# Altium PCB Fly_2_0425p1.PcbDoc (part 1 of 2)
Units mil, origin at the board's own origin, x right, y up, seen from the top; angles counter-clockwise.
Board outline 6426 x 1969.5 mil, 4 copper layers (TOP, GND02, PWR03, BOTTOM), stack 28.8 mil thick; 153 components, 128 nets, 741 pads, 411 vias.
Unrouted connection lines stored in the file: 3.
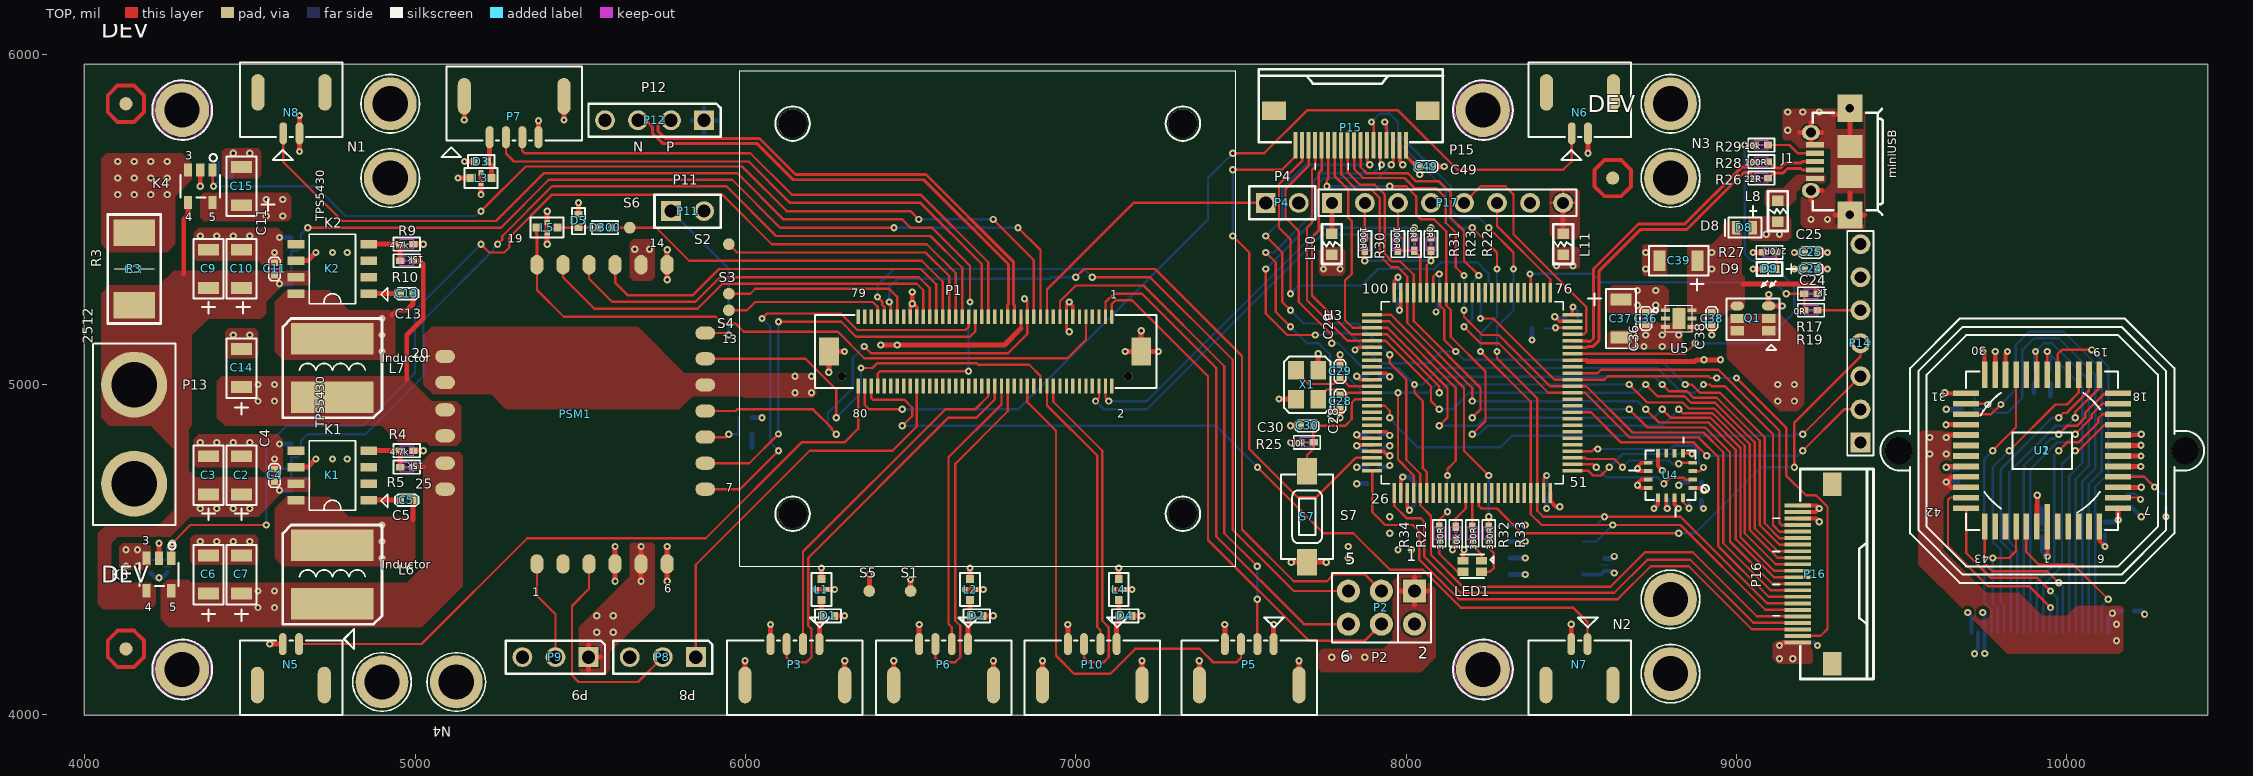
[diagram p0: TOP view]
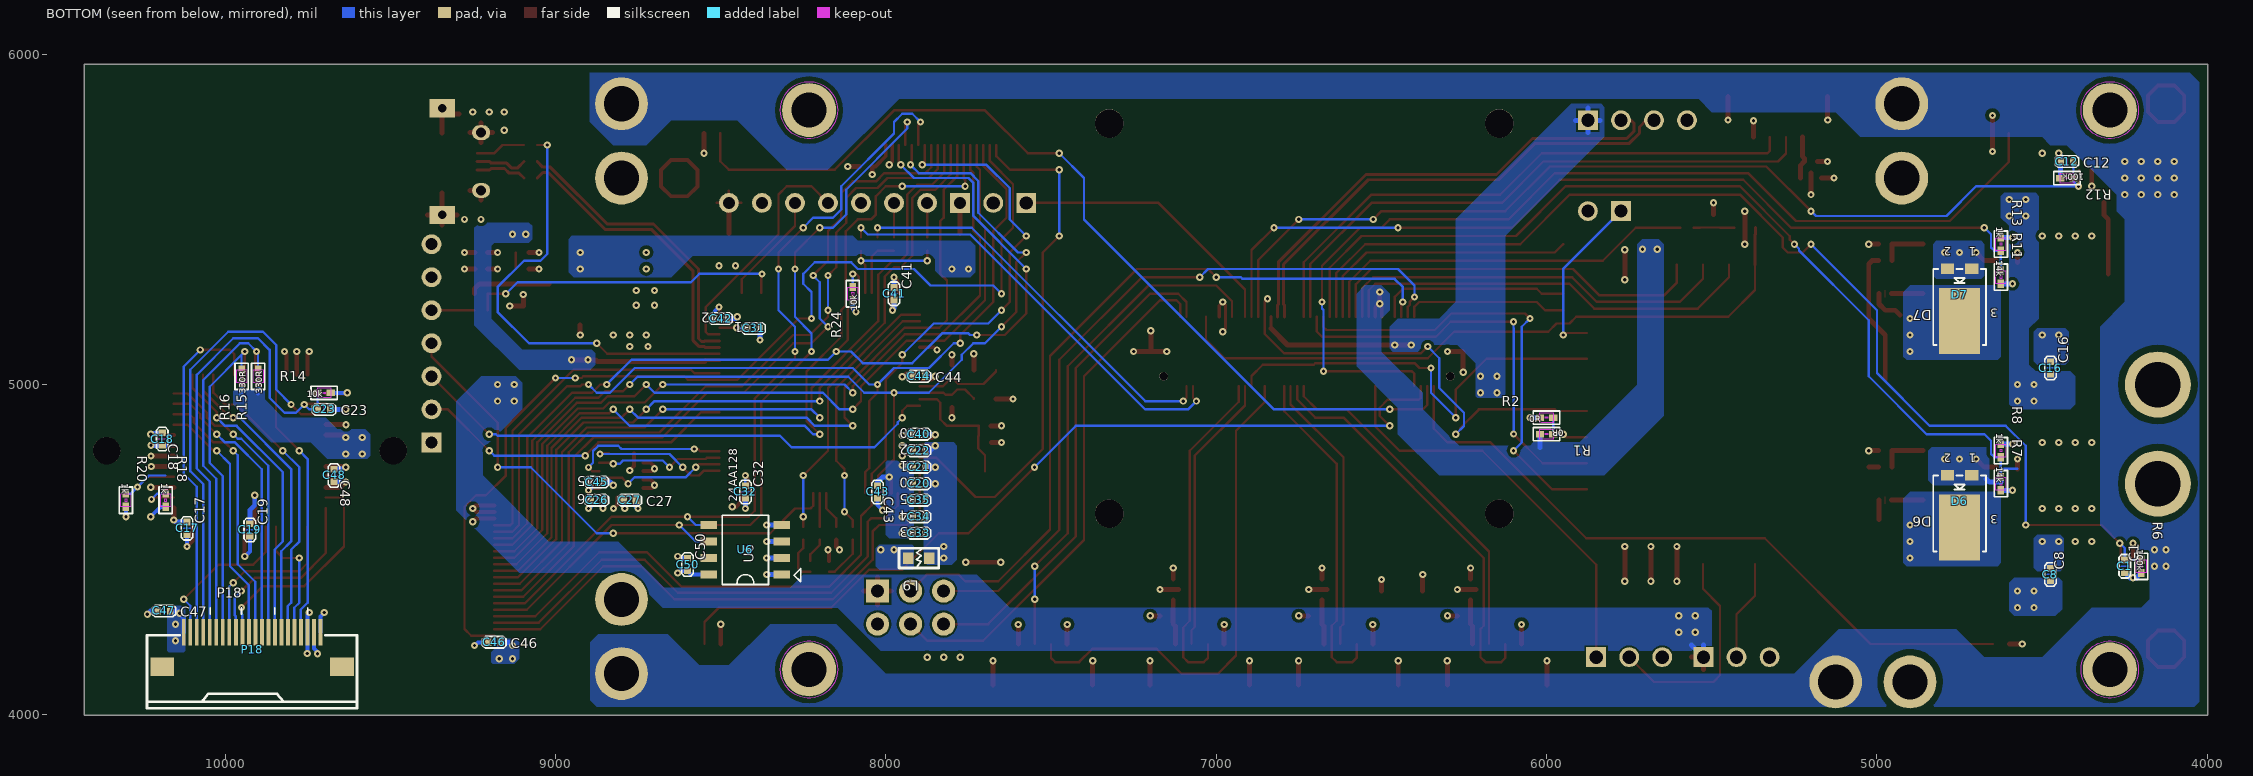
[diagram p1: BOTTOM view, seen from below]
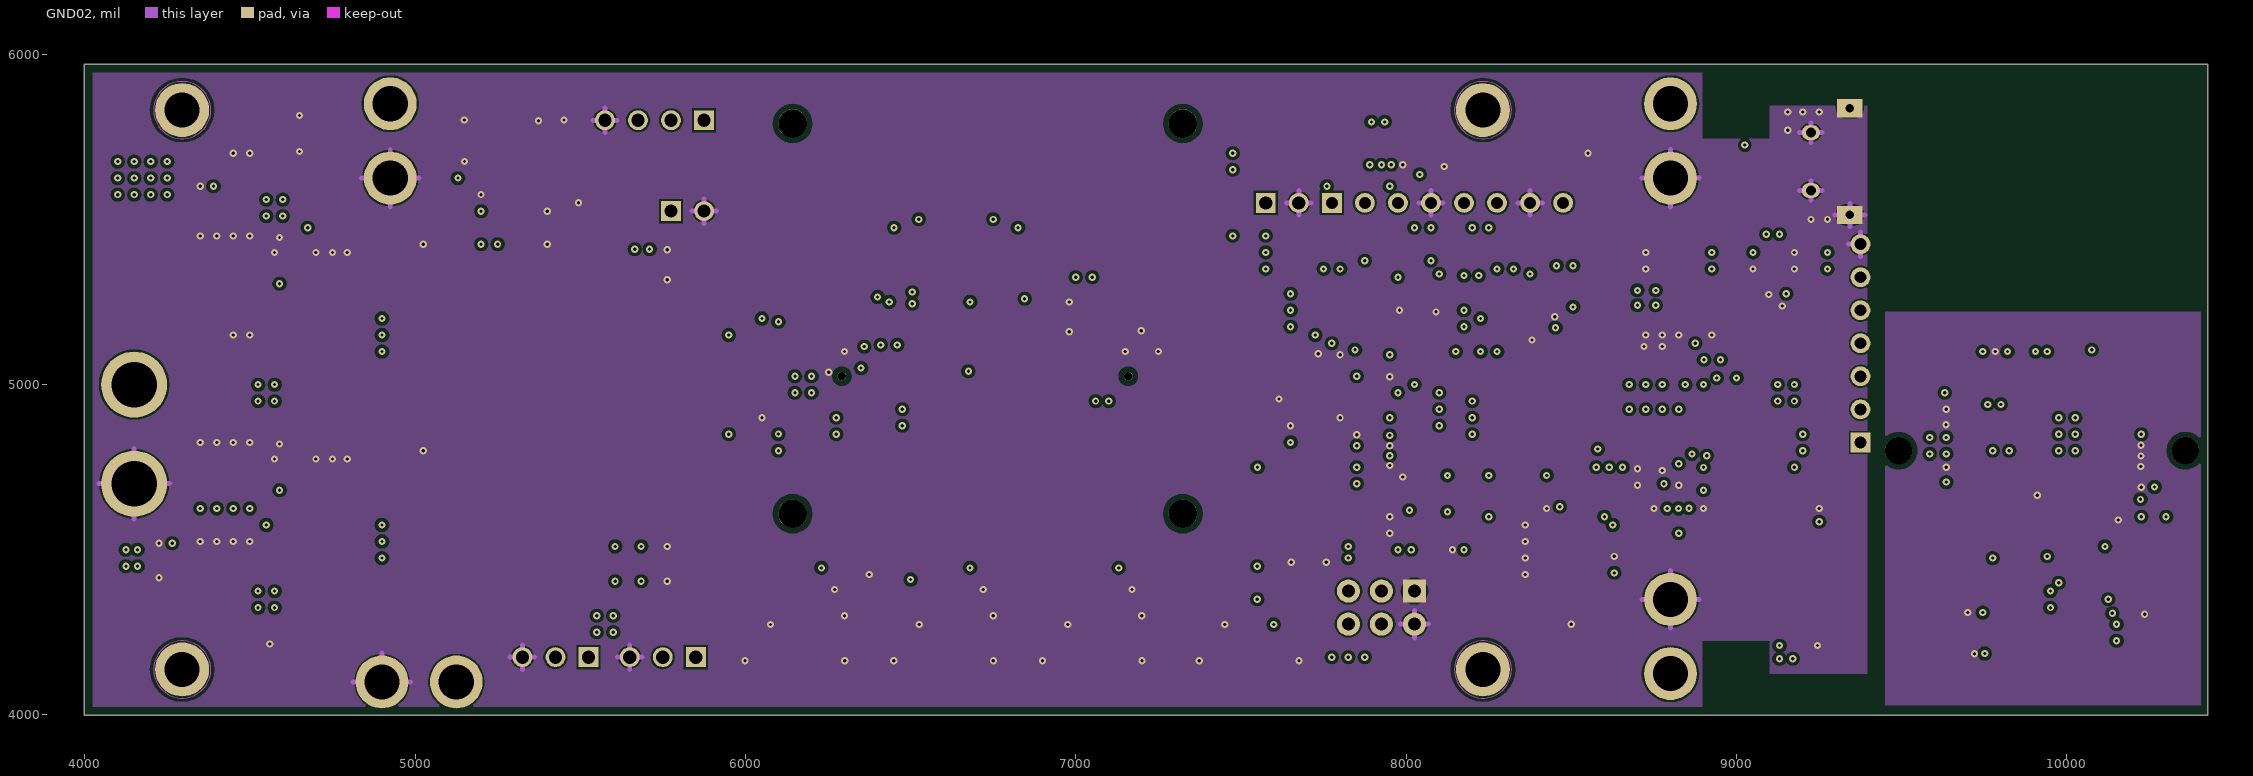
[diagram p2: GND02]
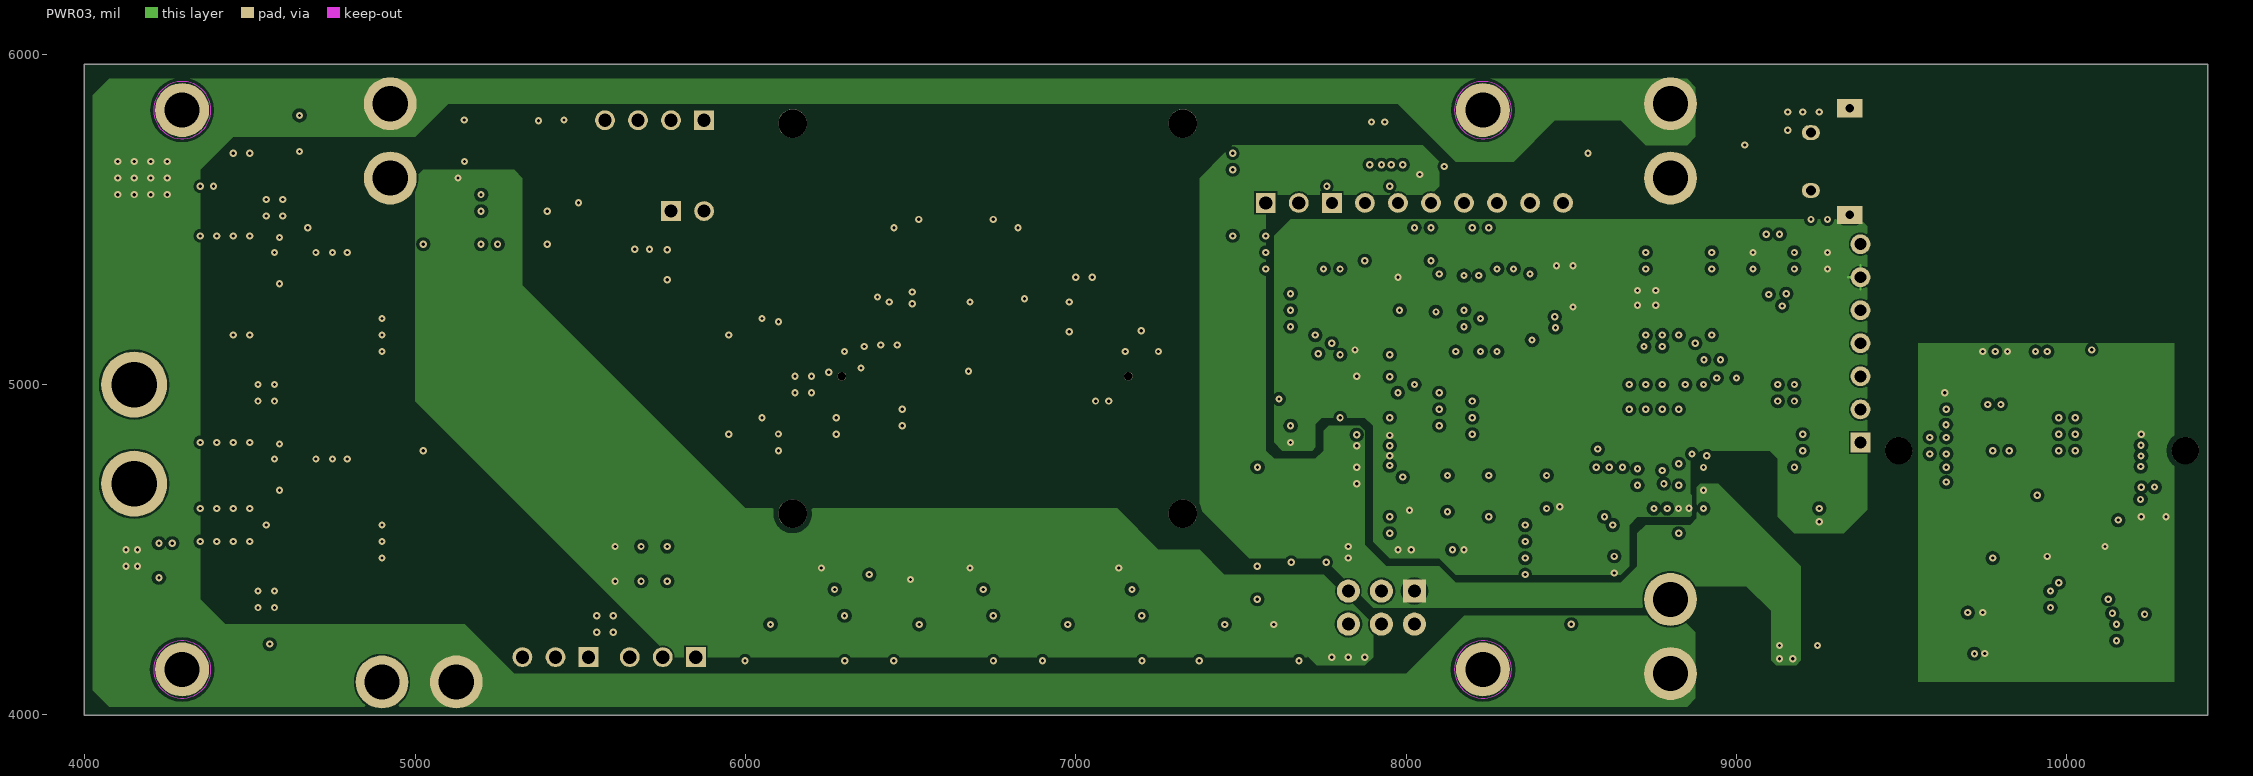
[diagram p3: PWR03]

## Layer stack, top to bottom
TOP: signal copper 1.2
Dielectric: core 8, FR-4, Dk 4.5
GND02: signal copper 1.2
Dielectric: core 8, FR-4, Dk 4.5
PWR03: signal copper 1.2
Dielectric: core 8, FR-4, Dk 4.5
BOTTOM: signal copper 1.2

## Board outline
3999.5,3999.5 10425.5,3999.5 10425.5,5969 3999.5,5969

## Design rules (kind name [scope] priority, off if disabled: settings)
Clearance [All] p1: gap=10
PlaneConnect [All] p1: planeconnectstyle=Direct reliefexpansion=20 reliefentries=4 reliefconductorwidth=10 reliefairgap=10
PolygonConnect [All] p1: connectstyle=Direct reliefconductorwidth=10 reliefentries=4 polygonreliefangle="90 Angle" airgapwidth=10
RoomDefinition CompsKeepin0 [All vs False] p1: confinementstyle=ConfineIn formatcopy=TRUE lockcomponents=FALSE outline 8871.25,4050 4050,4050 4050,5918.5 8871.25,5918.5 8871.25,5718.5 9125,5718.5 9125,5818.5 9371.25,5818.5 9371.25,4150 9125,4150 9125,4250 8871.25,4250 8871.25,4050
RoutingVias [All] p1: holewidth=28 width=50 viastyle="Through Hole" minholewidth=28 minwidth=50 maxholewidth=28 maxwidth=50
SolderMaskExpansion [All] p1: expansion=4
Width [All] p1: maxlimit=10 minlimit=10 preferedwidth=10 impedancedriven=TRUE minimp=66.780000 maximp=66.780000 favimp=66.780000
27 further rules are at their usual default settings.

## Components (designator, comment, footprint, x,y, rotation, side; value= is the part's Value field where it differs from the comment)
C1 "C0402" C0402#1 4250,4450 r270 bottom
C2 "C1206" C1206 4475,4725.45 r90 top
C3 "C1206" C1206 4375,4725.45 r90 top
C4 "C0402" C0402#2 4575,4725 r90 top
C5 "C0402" C0402#3 4975,4650 r0 top
C6 "C1206" C1206 4375,4425.45 r90 top
C7 "C1206" C1206 4475,4425.45 r90 top
C8 "C0402" C0402#1 4475,4425 r270 bottom
C9 "C1206" C1206 4375,5350.45 r90 top
C10 "C1206" C1206 4475,5350.45 r90 top
C11 "C0402" C0402#2 4575,5350 r90 top
C12 "C0402" C0402#4 4425,5675 r0 bottom
C13 "C0402" C0402#3 4975,5275 r0 top
C14 "C1206" C1206 4475,5050.45 r90 top
C15 "C1206" C1206 4475,5600.45 r90 top
C16 "C0402" C0402#1 4475,5050 r270 bottom
C17 "C0402" C0402#1 10115,4565 r270 bottom
C18 "C0402" C0402#4 10190,4835 r90 bottom
C19 "C0402" C0402#1 9925,4560 r270 bottom
C20 "C0402" C0402#4 7900,4700 r180 bottom
C21 "C0402" C0402#4 7900,4750 r180 bottom
C22 "C0402" C0402#4 7900,4800 r180 bottom
C23 "C0402" C0402#4 9700,4925 r0 bottom
C24 "C0402" C0402#2 9225,5350 r180 top
C25 "C0402" C0402#2 9225,5400 r180 top
C26 "C0402" C0402#4 8875,4650 r180 bottom
C27 "C0402" C0402#4 8775,4650 r0 bottom
C28 "C0402" C0402#2 7800,4950 r270 top
C29 "C0402" C0402#2 7800,5040 r270 top
C30 "C0402" C0402#2 7700,4875 r180 top
C31 "C0402" C0402#4 8400,5170 r180 bottom
C32 "C0402" C0402#1 8425,4675 r270 bottom
C33 "C0402" C0402#4 7900,4550 r180 bottom
C34 "C0402" C0402#4 7900,4600 r180 bottom
C35 "C0402" C0402#4 7900,4650 r180 bottom
C36 "C0402" C0402#2 8725,5200 r270 top
C37 "C1206" C1206 8650,5199.55 r270 top
C38 "C0402" C0402#2 8925,5200 r270 top
C39 "C1206" C1206 8824.55,5375 r180 top
C40 "C0402" C0402#4 7900,4850 r180 bottom
C41 "C0402" C0402#1 7975,5275 r270 bottom
C42 "C0402" C0402#4 8500,5200 r180 bottom
C43 "C0402" C0402#4 8025,4675 r90 bottom
C44 "C0402" C0402#4 7900,5025 r0 bottom
C45 "C0402" C0402#4 8875,4705 r180 bottom
C46 "C0402" C0402#4 9185,4220 r0 bottom
C47 "C0402" C0402#4 10185,4315 r0 bottom
C48 "C0402" C0402#4 9670,4725 r90 bottom
C49 "C0402" C0402#2 8060,5660 r180 top
C50 "C0402" C0402#1 8600,4455 r270 bottom
D1 "0402-TVS" 0402-TVS 6250,4300 r0 top
D2 "0402-TVS" 0402-TVS 6700,4300 r0 top
D3 "0402-TVS" 0402-TVS 5200,5675 r180 top
D4 "0402-TVS" 0402-TVS 7150,4300 r0 top
D5 "0402-TVS" 0402-TVS 5495,5495 r90 top
D6 "TO-277A" TO-277A 4750,4612.5 r180 bottom
D7 "TO-277A" TO-277A 4750,5237.5 r180 bottom
D8 "D0603" D0603 9025,5475 r180 top
D9 "LED0402" LED0402 9100,5350 r180 top
D300 "0402-TVS" 0402-TVS 5575,5475 r0 top
J1 "USBMICRO5_6A" USBMICRO5_6A 9320.08,5674.8 r90 top
K1 "HSOIC-8" HSOIC-8#1 4750,4725 r90 top
K2 "HSOIC-8" HSOIC-8#1 4750,5350 r90 top
K3 "SOT-23-5" SOT-23-5 4225,4425 r180 top
K4 "SOT-23-5" SOT-23-5 4350,5600 r180 top
L1 "KYOCERA-KNH16-DA" KYOCERA-KNH16-DA 6230,4380 r270 top
L2 "KYOCERA-KNH16-DA" KYOCERA-KNH16-DA 6680,4380 r270 top
L3 "KYOCERA-KNH16-DA" KYOCERA-KNH16-DA 5200,5625 r0 top
L4 "KYOCERA-KNH16-DA" KYOCERA-KNH16-DA 7130,4380 r270 top
L5 "KYOCERA-KNH16-DA" KYOCERA-KNH16-DA 5400,5475 r180 top
L6 "CKCD5D28" CKCD5D28 4750,4425 r0 top
L7 "CKCD5D28" CKCD5D28 4750,5050 r0 top
L8 "L0603" L0603#1 9125,5525 r90 top
L9 "L0603" L0603#2 7900,4475 r180 bottom
L10 "L0603" L0603#1 7775,5425 r270 top
L11 "L0603" L0603#1 8475,5425 r270 top
LED1 "LTST-C19HE1WT" LTST-C19HE1WT 8200,4450 r270 top
N1 "ESC_POWER" ESC_POWER 4925,5737.5 r270 top
N2 "ESC_POWER" ESC_POWER 8800,4237.5 r90 top
N3 "ESC_POWER" ESC_POWER 8800,5737.5 r270 top
N4 "ESC_POWER" ESC_POWER 5012.5,4100 r180 top
N5 "EXC_CONTROL" EXC_CONTROL 4625.55,4113.28 r180 top
N6 "EXC_CONTROL" EXC_CONTROL 8524.45,5861.72 r0 top
N7 "EXC_CONTROL" EXC_CONTROL 8525.55,4113.28 r180 top
N8 "EXC_CONTROL" EXC_CONTROL 4624.45,5861.72 r0 top
P1 "CON-DF17-80M" CON-DF17-80M 6725.28,5100.34 r0 top
P2 "HDR2X3" HDR2X3 7927.25,4322.5 r180 top
P3 "CLICKMATE_V4" CLICKMATE_V4 6149.8,4113.28 r180 top
P4 "HDR1X2" HDR1X2 7625,5550 r0 top
P5 "CLICKMATE_V4" CLICKMATE_V4 7524.8,4113.28 r180 top
P6 "CLICKMATE_V4" CLICKMATE_V4 6599.8,4113.28 r180 top
P7 "CLICKMATE_V4" CLICKMATE_V4 5300,5850 r0 top
P8 "HDR1X3" HDR1X3 5750,4175 r180 top
P9 "HDR1X3" HDR1X3 5425,4175 r180 top
P10 "CLICKMATE_V4" CLICKMATE_V4 7049.8,4113.28 r180 top
P11 "HDR1X2" HDR1X2 5825,5525 r0 top
P12 "HDR1X4" HDR1X4 5725,5800 r180 top
P13 "VBAT_JACK" VBAT_JACK 4150,4850 r270 top
P14 "HDR1X7" HDR1X7 9375,5125 r90 top
P15 "FPC-18_0P5" FPC-18_0P5 7832.5,5845 r180 top
P16 "FPC-22_0P5" FPC-22_0P5#1 9305,4427.5 r90 top
P17 "HDR1X8" HDR1X8 8125,5550 r0 top
P18 "FPC-22_0P5" FPC-22_0P5#2 9917.5,4130 r0 bottom
PSM1 "PSM" PSM 5484.84,4909.85 r90 top
Q1 "TSOP-6" TSOP-6 9050,5196.5 r90 top
R1 "R0402" R0402#1 6000,4850 r180 bottom
R2 "R0402" R0402#1 6000,4900 r0 bottom
R3 "2512" 2512 4150,5350 r90 top
R4 "R0402" R0402#2 4975,4800 r0 top
R5 "R0402" R0402#2 4975,4750 r180 top
R6 "R0402" R0402#1 4200,4450 r90 bottom
R7 "R0402" R0402#1 4625,4700 r90 bottom
R8 "R0402" R0402#1 4625,4800 r90 bottom
R9 "R0402" R0402#2 4975,5425 r0 top
R10 "R0402" R0402#2 4975,5375 r180 top
R11 "R0402" R0402#1 4625,5325 r90 bottom
R12 "R0402" R0402#1 4425,5625 r180 bottom
R13 "R0402" R0402#1 4625,5425 r90 bottom
R14 "R0402" R0402#1 9700,4975 r0 bottom
R15 "R0402" R0402#1 9900,5025 r270 bottom
R16 "R0402" R0402#1 9950,5025 r270 bottom
R17 "R0402" R0402#2 9225,5275 r180 top
R18 "R0402" R0402#1 10180,4650 r90 bottom
R19 "R0402" R0402#2 9225,5225 r0 top
R20 "R0402" R0402#1 10300,4650 r90 bottom
R21 "R0402" R0402#2 8150,4550 r90 top
R22 "R0402" R0402#2 8075,5425 r270 top
R23 "R0402" R0402#2 8025,5425 r270 top
R24 "R0402" R0402#1 8100,5275 r270 bottom
R25 "R0402" R0402#2 7700,4825 r0 top
R26 "R0402" R0402#2 9075,5625 r0 top
R27 "R0402" R0402#2 9100,5400 r180 top
R28 "R0402" R0402#2 9075,5675 r0 top
R29 "R0402" R0402#2 9075,5725 r0 top
R30 "R0402" R0402#2 7875,5425 r270 top
R31 "R0402" R0402#2 7975,5425 r270 top
R32 "R0402" R0402#2 8200,4550 r90 top
R33 "R0402" R0402#2 8250,4550 r90 top
R34 "R0402" R0402#2 8100,4550 r90 top
S1 "PAD_04X04" PAD_04X04 6500,4375 r0 top
S2 "PAD_04X04" PAD_04X04 5950,5425 r0 top
S3 "PAD_04X04" PAD_04X04 5950,5275 r0 top
S4 "PAD_04X04" PAD_04X04 5950,5225 r0 top
S5 "PAD_04X04" PAD_04X04 6375,4375 r0 top
S6 "PAD_04X04" PAD_04X04 5650,5475 r0 top
S7 "SWITCH" SWITCH 7700,4600 r270 top
U1 "CLCC-48" CLCC-48 9924.96,4799.96 r180 top
U2 "LENSMOUNT_LARGE_M12" LENSMOUNT_LARGE_M12 9914.69,4800 r180 top
U3 "STM-LQFP100_N" STM-LQFP100_N 8200,4975 r0 top
U4 "L3GD20" L3GD20 8800,4725 r180 top
U5 "S-PDSO-N6" S-PDSO-N6 8825,5200 r0 top
U6 "HSOIC-8" HSOIC-8#2 8425,4500 r270 bottom
X1 "3225SA" 3225SA 7700,5000 r90 top

## Footprints (in the part's own frame and the unit in brackets; to place one, negate y for a bottom-side part, rotate by r counter-clockwise, add the part's x,y. Pads: shape width x height; smd on the part's side, far side on the other; paste and mask are expansions set on the pad)
0402-TVS [mil] "0402-TVS"
  rect 20x24 smd: A(20,0) C(-19.68,0)
  silkscreen extent -40,-20 40,20
2512 [mil] "2512"
  rect 80x126 smd: 1(-110,0) 2(110,0)
  silkscreen extent -165,-80 165,80
3225SA [mil] "3225SA"
  rect 56x48 smd: 1(-43.65,-33.73) 2(43.65,-33.73) 3(43.65,33.73) 4(-43.65,33.73)
  silkscreen extent -110,-95 85,70
C0402#1 [mil] "C0402"
  rect 20x22 smd: 1(19,0) 2(-19,0)
  TOP lines w1: 0.75,10.9 0.75,-10 -0.25,-10 -0.25,10.9 0.75,10.9
  silkscreen extent -36,-18 36,18
C0402#2 [mil] "C0402"
  rect 20x22 smd: 1(-19,0) 2(19,0)
  TOP keep-out region: -0.75,-10.9 0.25,-10.9 0.25,10 -0.75,10 -0.75,-10.9
  silkscreen extent -36,-18 36,18
C0402#3 [mil] "C0402"
  rect 20x22 smd: 1(-19,0) 2(19,0)
  TOP lines w1: -0.75,-10.9 0.25,-10.9 0.25,10 -0.75,10 -0.75,-10.9
  silkscreen extent -36,-18 36,18
C0402#4 [mil] "C0402"
  rect 20x22 smd: 1(19,0) 2(-19,0)
  TOP keep-out region: 0.75,10.9 0.75,-10 -0.25,-10 -0.25,10.9 0.75,10.9
  silkscreen extent -36,-18 36,18
C1206 [mil] "C1206"
  rect 36x63 smd: 1(-57.55,0) 2(57.55,0)
  silkscreen extent -90,-45 90,45
CKCD5D28 [mil] "CKCD5D28"
  rect 250x95 smd: 1(0,88.5) 2(0,-88.5)
  silkscreen extent -150,-150 150,150
CLCC-48 [mil] "CLCC-48"
  rect 17x138 smd: 1(-15.79,229.96)
  rect 17x79 smd: 2(-47.28,229.96) 3(-78.78,229.96) 4(-110.28,229.96) 5(-141.77,229.96) 6(-173.27,229.96) 19(-173.27,-229.96) 20(-141.77,-229.96) 21(-110.28,-229.96) 22(-78.78,-229.96) 23(-47.28,-229.96) 24(-15.79,-229.96) 25(15.96,-229.96) 26(47.96,-229.96) 27(78.96,-229.96) 28(110.96,-229.96) 29(141.96,-229.96) 30(173.96,-229.96) 43(173.96,229.96) 44(141.96,229.96) 45(110.96,229.96) 46(78.96,229.96) 47(47.96,229.96) 48(15.96,229.96)
  rect 79x17 smd: 7(-229.96,173.96) 8(-229.96,141.96) 9(-229.96,110.96) 10(-229.96,78.96) 11(-229.96,47.96) 12(-229.96,15.96) 13(-229.96,-15.79) 14(-229.96,-47.28) 15(-229.96,-78.78) 16(-229.96,-110.28) 17(-229.96,-141.77) 18(-229.96,-173.27) 31(229.96,-173.27) 32(229.96,-141.77) 33(229.96,-110.28) 34(229.96,-78.78) 35(229.96,-47.28) 36(229.96,-15.79) 37(229.96,15.96) 38(229.96,47.96) 39(229.96,78.96) 40(229.96,110.96) 41(229.96,141.96) 42(229.96,173.96)
  silkscreen extent -230,-240 230,240
CLICKMATE_V4 [mil] "CLICKMATE_V4"
  oval 24x67 smd: 1(-74.02,-101.28) 2(-24.81,-101.28) 3(24.8,-101.28) 4(73.8,-101.28)
  oval 40x111 smd: 5(-150.8,22.73) 6(150.8,22.73)
  silkscreen extent -205,-182 205,113
CON-DF17-80M [mil] "CON-DF17-80M"
  oval 10x44 smd: 1(383.72,104.66)
  rect 10x44 smd: 2(383.72,-104.66) 3(364.72,104.66) 4(364.72,-104.66) 5(344.72,104.66) 6(344.72,-104.66) 7(324.72,104.66) 8(324.72,-104.66) 9(305.72,104.66) 10(305.72,-104.66) 11(285.72,104.66) 12(285.72,-104.66) 13(265.72,104.66) 14(265.72,-104.66) 15(246.72,104.66) 16(246.72,-104.66) 17(226.72,104.66) 18(226.72,-104.66) 19(206.72,104.66) 20(206.72,-104.66) 21(187.72,104.66) 22(187.72,-104.66) 23(167.72,104.66) 24(167.72,-104.66) 25(147.72,104.66) 26(147.72,-104.66) 27(127.72,104.66) 28(127.72,-104.66) 29(108.72,104.66) 30(108.72,-104.66) 31(88.72,104.66) 32(88.72,-104.66) 33(68.72,104.66) 34(68.72,-104.66) 35(49.72,104.66) 36(49.72,-104.66) 37(29.72,104.66) 38(29.72,-104.66) 39(9.72,104.66) 40(9.72,-104.66) 41(-10.12,104.66) 42(-10.12,-104.66) 43(-29.81,104.66) 44(-29.81,-104.66) 45(-49.49,104.66) 46(-49.49,-104.66) 47(-69.18,104.66) 48(-69.18,-104.66) 49(-88.86,104.66) 50(-88.86,-104.66) 51(-108.55,104.66) 52(-108.55,-104.66) 53(-128.23,104.66) 54(-128.23,-104.66) 55(-147.92,104.66) 56(-147.92,-104.66) 57(-167.6,104.66) 58(-167.6,-104.66) 59(-187.29,104.66) 60(-187.29,-104.66) 61(-206.97,104.66) 62(-206.97,-104.66) 63(-226.66,104.66) 64(-226.66,-104.66) 65(-246.34,104.66) 66(-246.34,-104.66) 67(-266.03,104.66) 68(-266.03,-104.66) 69(-285.71,104.66) 70(-285.71,-104.66) 71(-305.4,104.66) 72(-305.4,-104.66) 73(-325.08,104.66) 74(-325.08,-104.66) 75(-344.77,104.66) 76(-344.77,-104.66) 77(-364.45,104.66) 78(-364.45,-104.66) 79(-384.14,104.66) 80(-384.14,-104.66)
  rect 60x85 smd: 81(-472.72,-0.34) 82(472.72,-0.34)
  round 26 hole 26: " "(-433.35,-75.14) " "(433.72,-75.14)
  silkscreen extent -515,-110 520,110
D0603 [mil] "D0603"
  rect 25x41 smd: 1(-23.82,0) 2(26.77,0)
  silkscreen extent -50,-65 60,30
ESC_POWER [mil] "ESC_POWER"
  round 160 hole 106.3: 1(-112.5,0) 2(112.5,0)
  silkscreen extent -201,-89 201,89
EXC_CONTROL [mil] "EXC_CONTROL"
  oval 24x67 smd: 1(-23.27,-101.28) 2(25.94,-101.28)
  oval 40x111 smd: GND(102.7,22.73) GND/2(-100.05,22.73)
  silkscreen extent -189,-147 156,113
FPC-18_0P5 [mil] "FPC-18_0P5"
  rect 12.01x80 smd: 1(-167.5,120) 2(-147.81,120) 3(-128.13,120) 4(-108.44,120) 5(-88.76,120) 6(-69.07,120) 7(-49.39,120) 8(-29.7,120) 9(-10.02,120) 10(9.67,120) 11(29.35,120) 12(49.04,120) 13(68.72,120) 14(88.41,120) 15(108.09,120) 16(127.78,120) 17(147.46,120) 18(167.15,120)
  rect 72.01x55.98 smd: " "(-232.74,15.63) " "(232.39,15.63)
  silkscreen extent -279,-109 279,196
FPC-22_0P5#1 [mil] "FPC-22_0P5"
  rect 12.01x80 smd: 1(-207.5,120) 2(-187.81,120) 3(-168.13,120) 4(-148.44,120) 5(-128.76,120) 6(-109.07,120) 7(-89.39,120) 8(-69.7,120) 9(-50.02,120) 10(-30.33,120) 11(-10.65,120) 12(9.04,120) 13(28.72,120) 14(48.41,120) 15(68.09,120) 16(87.78,120) 17(107.46,120) 18(127.15,120) 19(146.83,120) 20(166.52,120) 21(186.2,120) 22(205.89,120)
  rect 72.01x55.98 smd: " "(-272.74,15.63) " "(271.13,15.63)
  silkscreen extent -319,-109 318,196
FPC-22_0P5#2 [mil] "FPC-22_0P5"
  rect 12.01x80 smd: 1(207.5,-120) 2(187.81,-120) 3(168.13,-120) 4(148.44,-120) 5(128.76,-120) 6(109.07,-120) 7(89.39,-120) 8(69.7,-120) 9(50.02,-120) 10(30.33,-120) 11(10.65,-120) 12(-9.04,-120) 13(-28.72,-120) 14(-48.41,-120) 15(-68.09,-120) 16(-87.78,-120) 17(-107.46,-120) 18(-127.15,-120) 19(-146.83,-120) 20(-166.52,-120) 21(-186.2,-120) 22(-205.89,-120)
  rect 72.01x55.98 smd: " "(-271.13,-15.63) " "(272.74,-15.63)
  silkscreen extent -318,-196 319,109
HDR1X2 [mil] "HDR1X2"
  rect 60x60 hole 40: 1(-50,0)
  round 60 hole 40: 2(50,0)
  silkscreen extent -100,-110 100,50
HDR1X3 [mil] "HDR1X3"
  rect 60x60 hole 40: 1(-100,0)
  round 60 hole 40: 2(0,0) 3(100,0)
  silkscreen extent -205,-50 150,50
HDR1X4 [mil] "HDR1X4"
  rect 60x60 hole 40: 1(-150,0)
  round 60 hole 40: 2(-50,0) 3(50,0) 4(150,0)
  silkscreen extent -255,-50 200,50
HDR1X7 [mil] "HDR1X7"
  rect 60x60 hole 36: 1(-300,0)
  round 60 hole 36: 2(-200,0) 3(-100,0) 4(0,0) 5(100,0) 6(200,0) 7(300,0)
  silkscreen extent -340,-40 340,40
HDR1X8 [mil] "HDR1X8"
  rect 60x60 hole 36: 1(-350,0)
  round 60 hole 36: 2(-250,0) 3(-150,0) 4(-50,0) 5(50,0) 6(150,0) 7(250,0) 8(350,0)
  silkscreen extent -390,-40 390,40
HDR2X3 [mil] "HDR2X3"
  rect 70x70 hole 40: 1(-97.75,-52.5)
  round 70 hole 40: 2(-97.75,47.5) 3(2.25,-52.5) 4(2.25,47.5) 5(102.25,-52.5) 6(102.25,47.5)
  silkscreen extent -148,-108 152,103
HSOIC-8#1 [mil] "HSOIC-8"
  rect 25x50 smd: 1(-75,-110.24) 2(-25,-110.24) 3(25,-110.24) 4(75,-110.24) 5(75,110.24) 6(25,110.24) 7(-25,110.24) 8(-75,110.24)
  silkscreen extent -105,-167 105,70
HSOIC-8#2 [mil] "HSOIC-8"
  rect 25x50 smd: 1(75,110.24) 2(25,110.24) 3(-25,110.24) 4(-75,110.24) 5(-75,-110.24) 6(-25,-110.24) 7(25,-110.24) 8(75,-110.24)
  silkscreen extent -105,-70 105,167
KYOCERA-KNH16-DA [mil] "KYOCERA-KNH16-DA"
  rect 24x24 smd: 1(-31.5,0) 2(32,0)
  rect 16x16 smd: 3(0,16) 4(0,-15.75)
  silkscreen extent -50,-30 50,30
L3GD20 [mil] "L3GD20"
  rect 26x12 smd: 1(-66.93,38.39) 2(-66.93,12.8) 3(-66.93,-12.8) 4(-66.93,-38.39) 9(66.93,-38.39) 10(66.93,-12.8) 11(66.93,12.8) 12(66.93,38.39)
  rect 12x26 smd: 5(-38.39,-66.93) 6(-12.8,-66.93) 7(12.8,-66.93) 8(38.39,-66.93) 13(38.39,66.93) 14(12.8,66.93) 15(-12.8,66.93) 16(-38.39,66.93)
  silkscreen extent -116,-115 125,125
L0603#1 [mil] "L0603"
  rect 32x35 smd: 1(-31.5,0) 2(31.5,0)
  silkscreen extent -60,-30 60,30
L0603#2 [mil] "L0603"
  rect 32x35 smd: 1(31.5,0) 2(-31.5,0)
  silkscreen extent -60,-30 60,30
LED0402 [mil] "LED0402"
  rect 20x25 smd: 1(-19.69,0) 2(19.69,0)
  silkscreen extent -80,-21 38,55
LENSMOUNT_LARGE_M12 [mil] "LENSMOUNT_LARGE_M12"
  round 82.13 hole 83: 1(-443.38,0) 2(423.69,0)
  silkscreen extent -500,-400 480,400
LTST-C19HE1WT [mm] "LTST-C19HE1WT"
  rect 0.55x0.85 smd: 1(-0.425,0.725) 4(-0.425,-0.725)
  rect 0.65x0.85 smd: 2(0.425,0.725) 3(0.425,-0.725)
  silkscreen extent -0.89,-0.89 0.89,1.65
PAD_04X04 [mm] "PAD_04X04"
  round 0.9 smd: 1(0,0)
PSM [mil] "PSM"
  oval 59.06x40 smd: 1(-452.76,115.84) 2(-452.76,36.84) 3(-452.76,-42.03) 4(-452.76,-120.77) 5(-452.76,-199.51) 6(-452.76,-278.25) 14(452.76,-278.25) 15(452.76,-199.51) 16(452.76,-120.77) 17(452.76,-42.03) 18(452.76,36.84) 19(452.76,115.84)
  oval 40x60 smd: 7(-226.39,-393.7) 8(-147.65,-393.7) 9(-68.91,-393.7) 10(10.15,-393.7) 11(89.15,-393.7) 12(168.15,-393.7) 13(246.15,-393.7) 20(175.19,393.7) 21(96.45,393.7) 22(13.77,393.7) 23(-64.97,393.7) 24(-147.65,393.7) 25(-226.39,393.7)
  silkscreen extent -485,-425 485,425
R0402#1 [mil] "R0402"
  rect 25x20 smd: 1(20,0) 2(-20,0)
  TOP keep-out region: 20,15 20,-15 -20,-15 -20,15 20,15
  TOP keep-out region: 4,2.5 4,-2.5 -4,-2.5 -4,2.5 4,2.5
  silkscreen extent -40,-20 40,20
R0402#2 [mil] "R0402"
  rect 25x20 smd: 1(-20,0) 2(20,0)
  TOP keep-out region: -20,-15 -20,15 20,15 20,-15 -20,-15
  TOP keep-out region: -4,-2.5 -4,2.5 4,2.5 4,-2.5 -4,-2.5
  silkscreen extent -40,-20 40,20
S-PDSO-N6 [mm] "S-PDSO-N6"
  rect 0.66x0.305 smd: 1(-1.016,0.635) 2(-1.016,0) 3(-1.016,-0.635) 4(1.016,-0.635) 5(1.016,0) 6(1.016,0.635)
  rect 1x1.6 smd: 7(0,0)
  silkscreen extent -1.96,-1 1.05,1
SOT-23-5 [mil] "SOT-23-5"
  rect 25x40 smd: 1(-37.4,-49.21) 2(0,-49.21) 3(37.4,-49.21) 4(37.4,49.21) 5(-37.4,49.21)
  silkscreen extent -59,-98 59,34
STM-LQFP100_N [mil] "STM-LQFP100_N"
  rect 60x11 smd: 1(-303.15,236.22) 2(-303.15,216.53) 3(-303.15,196.85) 4(-303.15,177.16) 5(-303.15,157.48) 6(-303.15,137.8) 7(-303.15,118.11) 8(-303.15,98.43) 9(-303.15,78.74) 10(-303.15,59.06) 11(-303.15,39.37) 12(-303.15,19.69) 13(-303.15,0) 14(-303.15,-19.69) 15(-303.15,-39.37) 16(-303.15,-59.06) 17(-303.15,-78.74) 18(-303.15,-98.43) 19(-303.15,-118.11) 20(-303.15,-137.8) 21(-303.15,-157.48) 22(-303.15,-177.16) 23(-303.15,-196.85) 24(-303.15,-216.53) 25(-303.15,-236.22) 51(303.15,-236.22) 52(303.15,-216.53) 53(303.15,-196.85) 54(303.15,-177.16) 55(303.15,-157.48) 56(303.15,-137.8) 57(303.15,-118.11) 58(303.15,-98.43) 59(303.15,-78.74) 60(303.15,-59.06) 61(303.15,-39.37) 62(303.15,-19.69) 63(303.15,0) 64(303.15,19.69) 65(303.15,39.37) 66(303.15,59.06) 67(303.15,78.74) 68(303.15,98.43) 69(303.15,118.11) 70(303.15,137.8) 71(303.15,157.48) 72(303.15,177.16) 73(303.15,196.85) 74(303.15,216.53) 75(303.15,236.22)
  rect 11x60 smd: 26(-236.22,-303.15) 27(-216.53,-303.15) 28(-196.85,-303.15) 29(-177.16,-303.15) 30(-157.48,-303.15) 31(-137.8,-303.15) 32(-118.11,-303.15) 33(-98.43,-303.15) 34(-78.74,-303.15) 35(-59.06,-303.15) 36(-39.37,-303.15) 37(-19.69,-303.15) 38(0,-303.15) 39(19.68,-303.15) 40(39.37,-303.15) 41(59.06,-303.15) 42(78.74,-303.15) 43(98.42,-303.15) 44(118.11,-303.15) 45(137.8,-303.15) 46(157.48,-303.15) 47(177.17,-303.15) 48(196.85,-303.15) 49(216.53,-303.15) 50(236.22,-303.15) 76(236.22,303.15) 77(216.53,303.15) 78(196.85,303.15) 79(177.17,303.15) 80(157.48,303.15) 81(137.8,303.15) 82(118.11,303.15) 83(98.42,303.15) 84(78.74,303.15) 85(59.06,303.15) 86(39.37,303.15) 87(19.68,303.15) 88(0,303.15) 89(-19.69,303.15) 90(-39.37,303.15) 91(-59.06,303.15) 92(-78.74,303.15) 93(-98.43,303.15) 94(-118.11,303.15) 95(-137.8,303.15) 96(-157.48,303.15) 97(-177.16,303.15) 98(-196.85,303.15) 99(-216.53,303.15) 100(-236.22,303.15)
  silkscreen extent -370,-276 276,276
SWITCH [mil] "SWITCH"
  rect 80x60 smd: 1(-137.8,0) 2(137.8,0)
  silkscreen extent -128,-79 128,79
TO-277A [mil] "TO-277A"
  rect 40x32 smd: 1(36.5,112.5) 2(-36.5,112.5)
  rect 125x200 smd: 3(0,-44.5)
  silkscreen extent -80,-118 80,113
TSOP-6 [mil] "TSOP-6"
  rect 28x40 smd: 1(-33.9,-47.24) 2(3.5,-47.24) 5(3.5,48) 6(-33.9,48)
  oval 28x40 smd: 3(41.5,-47.24) 4(41.5,48)
  silkscreen extent -92,-80 64,80
USBMICRO5_6A [mil] "USBMICRO5_6A"
  rect 16x55 smd: 1(-50.98,82.48) 2(-25.39,82.48) 3(0.2,82.48) 4(25.79,82.48) 5(51.38,82.48)
  oval 45x55 hole 30: 6(-87.4,95.28) 7(87.8,95.28)
  rect 82x75 / inner rect 55x77 / far side rect 55x77 hole 26: 8(-161.22,-22.83) 11(161.62,-22.83)
  rect 70x75 smd: 9(-45.08,-22.83) 10(45.48,-22.83)
  silkscreen extent -160,-122 160,89
VBAT_JACK [mil] "VBAT_JACK"
  round 200 hole 138: 1(-150,0) 2(150,0)
  silkscreen extent -275,-125 275,125

## Free pads (board coordinates)
  round 40 smd: 1(4125,4200) 1(4125,5850) 1(8625,5625)
  round 163.39 hole 106.3: 1(4295.27,4137.8) 1(4295.27,5830.7) 1(8232.27,4137.8) 1(8232.27,5830.7)
  round 86.6 hole 86.6: 1(6143,4609) 1(6143,5790) 1(7324,4609) 1(7324,5790)

## Via types
v1: diameter 22, hole 10, TOP to BOTTOM, 411 vias

## Nets (pads, with @x,y where several pads share a name; then routed paths per layer and width w, separated by ;. In a path a pad name is that pad's centre, name@x,y a point inside that pad or via, vN(x,y) a via of type N, cw(c..) or ccw(c..) an arc to the next point about the centre after c; other vN are vias at no path point)
ADC123_IN10: P14.3 U3.15 | length 1634.5
  TOP w7: U3.15@7896.85,4935.63 7935.35,4935.63 7950,4920.98 v1(7950,4900) ; v1(9200,4850) P14.3@9375,5025
  BOTTOM w7: v1(7950,4900) 7963.79,4886.21 7963.79,4881.21 8035,4810 8285,4810 8320,4845 9175.5,4845 9180.5,4850 v1(9200,4850)
ALARM: P1.24 PSM1.12 | length 1296.8
  TOP w7: PSM1.12@5878.54,5078 6182,5078 6275,4985 v1(6275,4900) ; v1(6350,5050) 6385,5050 6400,5065 6700,5065 6705,5060 6859.17,5060 6893,5026.17 P1.24@6893,4995.67
  BOTTOM w7: v1(6275,4900) 6350,4975 v1(6350,5050)
AUX_BATT_CURRENT_SENS: C12.2 K4.1 P1.25 R12.1 | length 3003.5
  TOP w7: K4.1@4387.4,5649.21 4387.4,5602.6 v1(4390,5600) ; v1(5200,5525) 5335,5660 5990,5660 6125,5525 6500,5525 v1(6525,5500) ; v1(6750,5500) 6873,5377 P1.25@6873,5205
  BOTTOM w7: C12.2@4406,5675 4406,5655.5 4405,5654.5 R12.1@4405,5625 4405,5615 v1(4390,5600) 4700,5600 4790,5510 5185,5510 v1(5200,5525) ; v1(6525,5500) v1(6750,5500)
AUX_BATT_VOLTAGE_SENS: P1.23 R11.1 R13.2 | length 2730.7
  TOP w7: v1(4675,5475) 5260,5475 5405,5620 5960,5620 6105,5475 v1(6450,5475) ; v1(6825,5475) 6893,5407 P1.23@6893,5205
  BOTTOM w7: R11.1@4625,5345 R13.2@4625,5405 4645,5405 4655,5415 4655,5455 v1(4675,5475) ; v1(6450,5475) v1(6825,5475)
AVDD_3V3_FLOW: C20.1 C21.1 C22.1 C33.1 C34.1 C35.1 C45.2 C46.2 C47.2 C48.2 C49.2 L9.1 P15.1 P16.1 P18.1 R15.1 R16.1 U1.35 U1.39 U1.40 U3.21 U4.1 | length 818.1
  TOP w11: P15.1@8000,5725 8000,5691.01 8031.01,5660 C49.2@8041,5660
  TOP w12: v1(7850,4815) 7852.52,4817.52 U3.21@7896.85,4817.52 ; U4.1@8866.93,4686.61 8893.39,4686.61 v1(8900,4680) ; v1(9130,4210) 9140,4220 P16.1@9185,4220
  TOP w15: v1(8041,5636) C49.2@8041,5660 ; v1(9635,4840) 9642.24,4847.24 U1.35@9695,4847.24 ; U1.40@9695,4689 9650,4689 9635,4704 v1(9635,4705) 9651,4721 U1.39@9695,4721
  BOTTOM w15: v1(7850,4700) C20.1@7881,4700 ; v1(7850,4750) C21.1@7881,4750 ; v1(7850,4815) 7865,4800 C22.1@7881,4800 ; C45.2@8894,4705 8894,4686 v1(8900,4680) ; v1(9130,4210) 9140,4220 C46.2@9166,4220 ; v1(9635,4705) 9636,4706 C48.2@9670,4706 ; 9900,4975 R15.1@9900,5005 ; 9950,4965 R16.1@9950,5005 ; P18.1@10125,4250 10125,4295 v1(10137.5,4307.5) 10145,4315 C47.2@10166,4315
  other v1: 9130,4170 9170,4170 10150,4225 10150,4275 7825,4475 7825,4510 9585,4790 9635,4790 9585,4840
BAT_ESC: K3.3 K4.3 N1.1 N2.1 N3.1 N4.1 R3.2
  other v1: 4125,4450 4160,4450 4125,4500 4160,4500 4100,5575 4150,5575 4200,5575 4250,5575 4100,5625 4150,5625 4200,5625 4250,5625 4100,5675 4150,5675 4200,5675 4250,5675
BATT_CURRENT_SENS_PROT: C1.2 K3.1 P1.49 R6.1 | length 3484.1
  TOP w7: K3.1@4262.4,4474.21 4262.4,4517.4 v1(4265,4520) 4320,4575 v1(4550,4575) ; v1(5200,5425) 5225,5400 5270,5400 5285,5415 5285,5445 5415,5575 5930,5575 6080,5425 6549.2,5425 6636.42,5337.78 P1.49@6636.42,5205
  BOTTOM w7: R6.1@4200,4470 4218.5,4470 4219.5,4469 C1.2@4250,4469 4250,4505 v1(4265,4520) ; v1(4550,4575) 4550,4815 4610,4875 4840,4875 5000.25,5035.25 5000.25,5225.25 v1(5200,5425)
BATT_VOLTAGE_SENS_PROT: P1.47 R7.1 R8.2 | length 2863.4
  TOP w7: v1(5250,5425) 5263.79,5438.79 5263.79,5448.79 5415,5600 5942.58,5600 6092.58,5450 6560,5450 6656.1,5353.9 P1.47@6656.1,5205
  BOTTOM w7: 4575,4745 4625,4745 ; R7.1@4625,4720 4625,4745 ; v1(5250,5425) 5236.21,5411.21 5236.21,5406.21 5025,5195 5025,5025 4850,4850 4675,4850 4655,4830 4655,4790 4645,4780 R8.2@4625,4780 4625,4745
BUZZER_OUT: P11.1 PSM1.13 | length 521.4
  TOP w7: PSM1.13@5878.54,5156 5944,5156 v1(5950,5150)
  BOTTOM w7: P11.1@5775,5525 5950,5350 v1(5950,5150)
CAN_H_2: P1.41 P7.2 | length 1787.5
  TOP w7: P7.2@5275.19,5748.72 5275.19,5699.81 5300,5675 6010,5675 6135,5550 6530,5550 6715.16,5364.84 P1.41@6715.16,5205
CAN_L_2: P1.39 P7.3 | length 1756.7
  TOP w7: P7.3@5324.8,5748.72 5324.8,5706.72 5331.51,5700 6015,5700 6140,5575 6530,5575 6735,5370 P1.39@6735,5205
D_N: J1.2 R26.2 | length 156.7
  TOP w9: R26.2@9095,5625 9110,5640 9140,5640 9154.2,5654.2 9194.24,5654.2 9199.03,5649.41 J1.2@9237.6,5649.41
D_P: J1.3 R28.2 | length 158.3
  TOP w9: R28.2@9095,5675 9114,5656 9133.37,5656 9147.58,5670.2 9194.24,5670.2 9199.03,5675 J1.3@9237.6,5675
FMU-SWCLK: P1.3 P2.6 | length 1503.1
  TOP w7: P1.3@7090,5205 7090,5250 7115,5275 7200,5275 7425,5050 7425,4540.36 7690.36,4275 P2.6@7825,4275
FMU-SWDIO: P1.1 P2.4 | length 1596.9
  TOP w7: P1.1@7109,5205 7109,5244 7120,5255 7170,5255 7400,5025 7400,4530 7705,4225 7875,4225 P2.4@7925,4275
GND: C1.1 C2.2 C3.2 C4.2 C6.2 C7.2 C8.2 C9.2 C10.2 C11.2 C12.1 C14.2 C15.2 C16.2 C17.2 C18.2 C19.2 C20.2 C21.2 C22.2 C23.2 C24.2 C25.2 C26.2 C27.2 C28.2 C29.1 C30.2 C31.1 C32.1 C33.2 C34.2 C35.2 C36.2 C37.2 C38.2 C39.2 C40.1 C41.1 C42.1 C43.1 C44.1 C45.1 C46.1 C47.1 C48.1 C49.1 C50.2 D1.A D2.A D3.A D4.A D5.A D6.1 D6.2 D7.1 D7.2 D9.2 J1.5 J1.6 J1.7 J1.8 J1.9 J1.10 J1.11 K1.6 K2.6 K3.2 K4.2 L1.3 L1.4 L2.3 L2.4 L3.3 L3.4 L4.3 L4.4 L5.3 L5.4 N1.2 N2.2 N3.2 N4.2 N5.2 N6.2 N7.2 N8.2 P1.13 P1.15 P1.81 P1.82 P2.2 P3.4 P3.5 P3.6 P4.2 P5.4 P5.5 P5.6 P6.4 P6.5 P6.6 P7.4 P7.5 P7.6 P8.3 P9.3 P10.4 P10.5 P10.6 P11.2 P12.4 P13.2 P14.7 P15.2 P16.21 P16.22 P17.4 P17.7 P18.21 P18.22 PSM1.6 PSM1.14 Q1.3 R2.1 R4.2 R6.2 R8.1 R9.2 R12.2 R13.1 R21.1 R24.1 S5.1 S7.2 U1.7 U1.9 U1.11 U1.12 U1.13 U1.29 U1.34 U1.38 U1.48 U3.10 U3.20 U3.27 U3.74 U3.99 U4.8 U4.9 U4.10 U4.11 U4.12 U4.13 U5.3 U5.7 U6.1 U6.2 U6.3 U6.4 X1.2 X1.4 | length 10101.6
  TOP w10: v1(6980,5160) 6972,5168 P1.15@6972,5205 6972,5242 v1(6980,5250) 6991,5239 P1.13@6991,5205 ; v1(7850,4847.84) 7850,4847.2 7860,4837.2 U3.20@7896.85,4837.2 ; U3.10@7896.85,5034.06 7939.35,5034.06 v1(7950,5023.4) ; v1(7980,5225) 7983.47,5228.47 U3.99@7983.47,5278.15
  TOP w11: P15.2@7980.31,5725 7980.31,5674.69 v1(7990,5665) ; U3.27@7983.47,4671.85 7983.47,4713.47 v1(7990,4720) ; v1(8450,5205) 8463.47,5191.53 U3.74@8503.15,5191.53
  TOP w12: U4.12@8733.07,4686.61 8708.39,4686.61 v1(8700,4695) 8700,4700.2 8712,4712.2 U4.11@8733.07,4712.2 ; U4.10@8733.07,4737.8 8707.2,4737.8 v1(8700,4745) 8700,4751.39 8712,4763.39 U4.9@8733.07,4763.39 ; v1(8750,4625) 8761.61,4636.61 U4.13@8761.61,4658.07 ; U4.8@8761.61,4791.93 8761.61,4753.39 v1(8775,4740) ; P16.21@9185,4613.7 9238.7,4613.7 v1(9250,4625) 9241.61,4633.39 P16.22@9185,4633.39
  TOP w15: K3.2@4225,4474.21 v1(4225,4520) ; v1(4350,5600) K4.2@4350,5649.21 ; v1(4560.43,4214.57) N5.2@4599.61,4214.57 ; C4.2@4575,4744 v1(4575,4775) ; C11.2@4575,5369 v1(4575,5400) ; K1.6@4639.76,4750 4675,4750 v1(4700,4775) ; K2.6@4639.76,5375 4675,5375 v1(4700,5400) ; v1(4650.39,5705.39) N8.2@4650.39,5760.43 v1(4650.39,5814.61) ; R4.2@4995,4800 v1(5025,4800) ; R9.2@4995,5425 v1(5025,5425) ; v1(5149.2,5800.8) P7.5@5149.2,5872.73 ; v1(5150,5675) D3.A@5180,5675 ; v1(5200,5575) L3.4@5200,5609.25 L3.3@5200,5641 ; P7.4@5373.8,5748.72 v1(5373.8,5798.8) ; v1(5400,5425) L5.3@5400,5459 L5.4@5400,5490.75 v1(5400,5525) ; v1(5450.8,5800.8) P7.6@5450.8,5872.73 ; D5.A@5495,5515 v1(5495,5550) ; v1(5763.09,4405) PSM1.6@5763.09,4457.09 v1(5763.09,4510) ; v1(5763.09,5316.91) PSM1.14@5763.09,5362.6 v1(5763.09,5408.09) ; P3.6@5999,4090.55 v1(5999,4164) ; P3.4@6076,4214.57 v1(6076,4274) ; L1.4@6214.25,4380 L1.3@6246,4380 v1(6270,4380) ; v1(6252.56,5037.56) P1.81@6252.56,5100 v1(6300,5100) ; D1.A@6270,4300 v1(6300,4300) ; P3.5@6300.59,4090.55 v1(6300.59,4164) ; S5.1@6375,4375 v1(6375,4425) ; P6.6@6449,4090.55 v1(6449,4164) ; P6.4@6526,4214.57 v1(6526,4274) ; L2.4@6664.25,4380 L2.3@6696,4380 v1(6720,4380) ; D2.A@6720,4300 v1(6750,4300) ; P6.5@6750.59,4090.55 v1(6750.59,4164) ; P10.6@6899,4090.55 v1(6899,4164) ; P10.4@6976,4214.57 v1(6976,4274) ; L4.4@7114.25,4380 L4.3@7146,4380 v1(7170,4380) ; v1(7150,5100) P1.82@7198,5100 ; D4.A@7170,4300 v1(7200,4300) ; v1(7198,5163) P1.82@7198,5100 ; P10.5@7200.59,4090.55 v1(7200.59,4164) ; v1(7250,5100) P1.82@7198,5100 ; P5.6@7374,4090.55 v1(7374,4164) ; P5.4@7451,4214.57 v1(7451,4274) ; v1(7615,4956.35) X1.4@7666.27,4956.35 ; v1(7650,4875) C30.2@7681,4875 ; v1(7652.2,4462.2) S7.2@7700,4462.2 v1(7757.8,4462.2) ; P5.5@7675.59,4090.55 v1(7675.59,4164) ; X1.2@7733.73,5043.65 v1(7733.73,5093.73) ; v1(7800,4900) C28.2@7800,4931 ; C29.1@7800,5059 v1(7800,5090) ; C49.1@8079,5660 v1(8115,5660) ; v1(8140,4500) 8150,4510 R21.1@8150,4530 ; N7.2@8499.61,4214.57 v1(8499.61,4274.61) ; v1(8550.39,5700.39) N6.2@8550.39,5760.43 ; v1(8925,5150) C38.2@8925,5181 ; v1(9050,5350) D9.2@9080.31,5350 ; v1(9097.24,5272.76) Q1.3@9097.24,5238 v1(9138,5238) ; v1(9175,5350) C24.2@9206,5350 ; v1(9175,5400) C25.2@9206,5400 ; 9190.3,5762.6 J1.7@9224.8,5762.6 ; 9224.8,5557.9 J1.6@9224.8,5587.4 9259.3,5587.4 ; J1.5@9224.8,5733.1 J1.7@9224.8,5762.6 ; 9224.8,5792.1 J1.7@9224.8,5762.6 ; 9259.3,5762.6 J1.7@9224.8,5762.6 ; 9291.58,5818.42 9324.91,5818.42 J1.11@9342.91,5836.42 9342.91,5762.09 ; 9298.41,5513.58 J1.8@9342.91,5513.58 ; J1.8@9342.91,5483.58 J1.8@9342.91,5513.58 ; 9342.91,5579.58 J1.8@9342.91,5513.58 ; 9387.41,5513.58 J1.8@9342.91,5513.58 ; v1(9633.74,4878.74) U1.34@9695,4878.74 ; v1(9635,4750) 9645,4750 9647,4752 U1.38@9695,4752 ; U1.29@9783,5029.92 v1(9783,5100) ; U1.48@9909,4570 9909,4634 9910,4635 v1(9910,4665) ; U1.7@10154.92,4626 10154.92,4590.08 v1(10155,4590) ; U1.9@10154.92,4689 v1(10225,4689) ; U1.11@10154.92,4752 v1(10223,4752) ; U1.12@10154.92,4784 v1(10224,4784) ; U1.13@10154.92,4815.75 10223.75,4815.75 v1(10224,4816)
  GND02 w15: 4043,4700 P13.2@4150,4700 ; 4150,4593 P13.2@4150,4700 ; 4150,4807 P13.2@4150,4700 ; 4257,4700 P13.2@4150,4700 ; 4813,4100 N4.2@4900,4100 ; 4838,5625 N1.2@4925,5625 ; 4900,4187 N4.2@4900,4100 ; 4925,5538 N1.2@4925,5625 ; 4925,5712 N1.2@4925,5625 ; 4987,4100 N4.2@4900,4100 ; 5012,5625 N1.2@4925,5625 ; 5288,4175 P9.3@5325,4175 ; 5325,4138 P9.3@5325,4175 ; 5325,4212 P9.3@5325,4175 ; 5362,4175 P9.3@5325,4175 ; 5538,5800 P12.4@5575,5800 ; 5575,5763 P12.4@5575,5800 ; 5575,5837 P12.4@5575,5800 ; 5612,5800 P12.4@5575,5800 ; 5613,4175 P8.3@5650,4175 ; 5650,4138 P8.3@5650,4175 ; 5650,4212 P8.3@5650,4175 ; 5687,4175 P8.3@5650,4175 ; 5838,5525 P11.2@5875,5525 ; 5875,5488 P11.2@5875,5525 ; 5875,5562 P11.2@5875,5525 ; 5912,5525 P11.2@5875,5525 ; 7638,5550 P4.2@7675,5550 ; 7675,5513 P4.2@7675,5550 ; 7675,5587 P4.2@7675,5550 ; 7712,5550 P4.2@7675,5550 ; 7983,4275 P2.2@8025,4275 ; 8025,4233 P2.2@8025,4275 ; 8025,4317 P2.2@8025,4275 ; 8038,5550 P17.4@8075,5550 ; 8067,4275 P2.2@8025,4275 ; 8075,5513 P17.4@8075,5550 ; 8075,5587 P17.4@8075,5550 ; 8112,5550 P17.4@8075,5550 ; 8338,5550 P17.7@8375,5550 ; 8375,5513 P17.7@8375,5550 ; 8375,5587 P17.7@8375,5550 ; 8412,5550 P17.7@8375,5550 ; 8713,4350 N2.2@8800,4350 ; 8713,5625 N3.2@8800,5625 ; 8800,4263 N2.2@8800,4350 ; 8800,4437 N2.2@8800,4350 ; 8800,5538 N3.2@8800,5625 ; 8800,5712 N3.2@8800,5625 ; 8887,4350 N2.2@8800,4350 ; 8887,5625 N3.2@8800,5625 ; 9190.3,5587.4 J1.6@9224.8,5587.4 ; 9190.3,5762.6 J1.7@9224.8,5762.6 ; 9224.8,5557.9 J1.6@9224.8,5587.4 ; 9224.8,5616.9 J1.6@9224.8,5587.4 ; 9224.8,5733.1 J1.7@9224.8,5762.6 ; 9224.8,5792.1 J1.7@9224.8,5762.6 ; 9259.3,5587.4 J1.6@9224.8,5587.4 ; 9259.3,5762.6 J1.7@9224.8,5762.6 ; 9297.41,5513.58 J1.8@9342.91,5513.58 ; 9338,5425 P14.7@9375,5425 ; 9342.91,5479.08 J1.8@9342.91,5513.58 ; 9342.91,5548.08 J1.8@9342.91,5513.58 ; 9375,5388 P14.7@9375,5425 ; 9375,5462 P14.7@9375,5425 ; 9388.41,5513.58 J1.8@9342.91,5513.58
  BOTTOM w12: v1(7850,4847.84) 7852.16,4850 C40.1@7881,4850 ; C22.2@7919,4800 7925,4800 7940,4815 v1(7950,4815) ; C44.1@7919,5025 7948.4,5025 v1(7950,5023.4) ; C46.1@9204,4220 9235,4220 v1(9245,4210) ; v1(9700,4310) 9711.61,4298.39 P18.22@9711.61,4250 ; v1(9720,4185) 9720,4190 9731.3,4201.3 P18.21@9731.3,4250
  BOTTOM w15: R6.2@4200,4430 4215,4415 v1(4225,4415) 4234,4415 C1.1@4250,4431 ; R12.2@4445,5625 4445,5650.5 4444,5651.5 C12.1@4444,5675 4444,5694 v1(4450,5700) ; v1(4590,4820) R8.1@4625,4820 ; v1(4590,5445) R13.1@4625,5445 ; 4625,4705 4660,4705 4670,4715 ; R2.1@6020,4900 v1(6050,4900) ; C21.2@7919,4750 7945,4750 v1(7950,4755) ; C41.1@7975,5256 7975,5230 v1(7980,5225) ; v1(7990,4720) 8010,4720 8025,4705 C43.1@8025,4694 ; v1(8090,5220) 8100,5230 R24.1@8100,5255 ; U6.1@8314.76,4425 v1(8360,4425) ; U6.2@8314.76,4475 v1(8360,4475) ; U6.3@8314.76,4525 v1(8360,4525) ; U6.4@8314.76,4575 v1(8360,4575) ; v1(8381,5135) C31.1@8381,5170 ; v1(8425,4625) C32.1@8425,4656 ; v1(8450,5205) 8455,5200 C42.1@8481,5200 ; C50.2@8600,4474 8624,4474 v1(8630,4480) ; v1(8750,4625) 8756,4631 C27.2@8756,4650 ; v1(8825,4695) 8835,4705 C45.1@8856,4705 ; C26.2@8894,4650 8894,4631 v1(8900,4625) ; v1(9635,4750) 9641,4744 C48.1@9670,4744 ; v1(9635,4925) C23.2@9681,4925 ; v1(9910,4665) 9910,4635 9925,4620 C19.2@9925,4579 ; C17.2@10115,4584 10149,4584 v1(10155,4590) ; C18.2@10180,4816 C18.2@10190,4816 v1(10224,4816) ; C47.1@10204,4315 10225,4315 v1(10235,4305)
  other v1: 4350,4525 4400,4525 4450,4525 4500,4525 7950,4550 7950,4600 4750,4775 4795,4775 4350,4825 4400,4825 4450,4825 4500,4825 8720,5115 8775,5115 4450,5150 4500,5150 8725,5150 8775,5150 8825,5150 8725,5350 4750,5400 4795,5400 8725,5400 4350,5450 4400,5450 4450,5450 4500,5450 9225,5500 9275,5500 4500,5700 9155,5770 9155,5825 9200,5825 9250,5825
I2C_2_SCL: P1.6 R22.1 | length 1333
  TOP w7: v1(7060,4950) 7070,4960 P1.6@7070,4995.67 ; R22.1@8075,5445 v1(8075,5475)
  BOTTOM w7: v1(7060,4950) 7085,4925 7215,4925 7744.5,5454.5 8054.5,5454.5 v1(8075,5475)
I2C_2_SDA: P1.4 R23.1 | length 1222.3
  TOP w7: P1.4@7090,4995.67 7090,4960 v1(7100,4950) ; R23.1@8025,5445 v1(8025,5475)
  BOTTOM w7: v1(7100,4950) 7215,4950 7740,5475 v1(8025,5475)
IO-CH1-PROT: N5.1 P1.80 | length 2091.7
  TOP w7: N5.1@4648.82,4214.57 5019.57,4214.57 5340,4535 5880,4535 6170,4825 6300,4825 6341.14,4866.14 P1.80@6341.14,4995.67
IO-CH2-PROT: N6.1 P1.78 | length 2820.5
  TOP w7: P1.78@6360.83,4995.67 6360.83,4939.17 6375,4925 v1(6475,4925) ; v1(7475,5700) 7570,5700 7700,5830 7975,5830 8155,5650 8475,5650 8501.18,5676.18 N6.1@8501.18,5760.43
  BOTTOM w7: v1(6475,4925) 6825,4925 7400,5500 7400,5625 v1(7475,5700)
IO-CH3-PROT: N7.1 P1.76 | length 2626.7
  TOP w7: P1.76@6380.51,4995.67 6380.51,4959.49 6386.21,4953.79 6481.21,4953.79 6505,4930 6505,4905 v1(6475,4875) ; v1(7550,4750) 7750,4550 7840,4550 7950,4440 8050,4440 8165,4325 8505,4325 8548.82,4281.18 N7.1@8548.82,4214.57
  BOTTOM w7: v1(6475,4875) 7425,4875 v1(7550,4750)
IO-CH4-PROT: N8.1 P1.74 | length 3052.6
  TOP w7: N8.1@4601.18,5760.43 4601.18,5673.82 4780,5495 5245,5495 5390,5640 5975,5640 6115,5500 6475,5500 6500,5475 6565,5475 6680,5360 v1(6680,5250) ; P1.74@6400.2,4995.67 6400.2,5033 6407.2,5040 v1(6675,5040)
  BOTTOM w7: v1(6675,5040) 6675,5225.5 6680,5230.5 v1(6680,5250)
IO-LED_SAFET_PROT: P1.28 P5.3 | length 1529.3
  TOP w7: P1.28@6853,4995.67 6853,4947 6940,4860 6940,4180 6995,4125 7105,4125 7180,4200 7375,4200 7415,4160 7487.43,4160 7500,4172.57 P5.3@7500,4214.57
IO-SWCLK: P1.71 P2.5 | length 2254.5
  TOP w7: v1(6400,5265) 6413.79,5251.21 6413.79,5241.59 6419.88,5235.5 P1.71@6419.88,5205 ; v1(7050,5325) 7225,5325 7475,5075 7475,4560 7660,4375 P2.5@7825,4375
  BOTTOM w7: v1(6400,5265) 6400,5300 6450,5350 7025,5350 v1(7050,5325)
IO-SWDIO: P1.69 P2.3 | length 2332.6
  TOP w7: v1(6435,5250) 6439.57,5245.43 P1.69@6439.57,5205 ; v1(7000,5325) 7025,5350 7240,5350 7503.28,5086.72 7503.28,4561.72 7660,4405 7760,4405 7780,4425 7875,4425 P2.3@7925,4375
  BOTTOM w7: v1(6435,5250) 6435,5295 6460,5320 6920,5320 6925,5325 v1(7000,5325)
NETC5_1: C5.1 K1.1 | length 95.8
  TOP w15: K1.1@4860.24,4650 C5.1@4956,4650
NETC5_2: C5.2 D6.3 K1.8 L6.1 | length 59
  TOP w15: 4994,4591 C5.2@4994,4650
  other v1: 4900,4475 4900,4525 4900,4575
NETC13_1: C13.1 K2.1 | length 95.8
  TOP w15: K2.1@4860.24,5275 C13.1@4956,5275
NETC13_2: C13.2 D7.3 K2.8 L7.1 | length 109.1
  TOP w15: 4930,5210 4945,5225 4975,5225 4994,5244 C13.2@4994,5275
  other v1: 4900,5100 4900,5150 4900,5200
NETC27_1: C27.1 U4.14 | length 60.9
  TOP w12: U4.14@8787.2,4658.07 8787.2,4627.8 v1(8790,4625)
  BOTTOM w12: v1(8790,4625) 8794,4629 C27.1@8794,4650
NETC30_1: C30.1 R25.2 S7.1 U3.14 | length 386.7
  TOP w7: S7.1@7700,4737.8 7700,4786.3 7720,4806.3 R25.2@7720,4825 7720,4843.5 7719,4844.5 C30.1@7719,4875 7814.06,4875 7814.53,4874.53 7835,4895 7835,4945 7845.31,4955.31 U3.14@7896.85,4955.31
NETC31_2: C31.2 U3.73 | length 84.9
  TOP w7: v1(8451.85,5171.85) U3.73@8503.15,5171.85
  BOTTOM w7: C31.2@8419,5170 8450,5170 v1(8451.85,5171.85)
NETC32_2: C32.2 U3.49 | length 87.7
  TOP w7: U3.49@8416.53,4671.85 8416.53,4716.53 v1(8425,4725)
  BOTTOM w7: C32.2@8425,4694 v1(8425,4725)
NETD1_C: D1.C L1.2 P3.1 | length 136.3
  TOP w15: P3.1@6223.82,4214.57 6223.82,4268.82 6230,4275 6230,4279.18 6230.32,4279.5 D1.C@6230.32,4300 6230.32,4320.5 6230,4320.82 L1.2@6230,4348
NETD3_C: D3.C L3.2 P7.1 | length 131.4
  TOP w15: P7.1@5225.98,5748.72 5225.98,5691.3 5219.68,5685 D3.C@5219.68,5675 5232,5662.68 L3.2@5232,5625
NETD4_C: D4.C L4.2 P10.1 | length 136.3
  TOP w15: P10.1@7123.82,4214.57 7123.82,4268.82 7130,4275 7130,4279.18 7130.32,4279.5 D4.C@7130.32,4300 7130.32,4320.5 7130,4320.82 L4.2@7130,4348
NETD5_C: D5.C D300.C L5.1 | length 124.1
  TOP w7: L5.1@5431.5,5475 5474.18,5475 5474.5,5475.32 D5.C@5495,5475.32 5536.5,5475.32 5536.82,5475 D300.C@5555.32,5475
NETD8_1: D8.1 L8.1 U3.68 | length 451.8
  TOP w11: U3.68@8503.15,5073.43 8545,5073.43
  TOP w15: 8545,5073.43 8548.42,5070 8873,5070 8878,5075 v1(8901.5,5075) v1(8951.5,5075)
  other v1: 9090,5455 9130,5455
NETD9_1: D9.1 R27.1 | length 50.1
  TOP w7: D9.1@9119.69,5350 9119.69,5381.19 9120,5381.5 R27.1@9120,5400
NETJ1_1: J1.1 L8.2
NETJ1_4: J1.4 R29.2 | length 152.7
  TOP w7: R29.2@9095,5725 9160,5725 9184.41,5700.59 J1.4@9237.6,5700.59
NETK1_4: K1.4 R4.1 R5.2 | length 144.8
  TOP w15: K1.4@4860.24,4800 R4.1@4955,4800 R5.2@4955,4750
NETK2_4: K2.4 R9.1 R10.2 | length 144.8
  TOP w15: K2.4@4860.24,5425 R9.1@4955,5425 R10.2@4955,5375
NETL10_1: L10.1 P17.1 | length 93.5
  TOP w15: L10.1@7775,5456.5 P17.1@7775,5550
NETL11_1: L11.1 P17.8 | length 204.5
  TOP w7: 8438,5550 P17.8@8475,5550 ; 8475,5587 P17.8@8475,5550 ; 8512,5550 P17.8@8475,5550
  TOP w15: L11.1@8475,5456.5 P17.8@8475,5550
NETLED1_1: LED1.1 R32.1 | length 75.1
  TOP w7: R32.1@8200,4530 8200,4514.6 8228.54,4486.06 LED1.1@8228.54,4466.73
NETLED1_2: LED1.2 R33.1 | length 132.8
  TOP w7: LED1.2@8228.54,4433.27 8253.78,4433.27 8265,4444.49 8265,4490 8250,4505 R33.1@8250,4530
NETLED1_3: LED1.3 R34.1 | length 136
  TOP w7: R34.1@8100,4530 8100,4488.27 8155,4433.27 LED1.3@8171.46,4433.27
NETP17_2: P17.2 R30.1 | length 105
  TOP w7: R30.1@7875,5445 P17.2@7875,5550
NETP17_3: P17.3 R31.1 | length 105
  TOP w7: R31.1@7975,5445 P17.3@7975,5550
NETP17_5: P17.5 U3.72 | length 732.8
  TOP w7: P17.5@8175,5550 8225,5600 8300,5600 8325,5575 8325,5455 8545,5235 8545,5159.16 8538,5152.16 U3.72@8503.15,5152.16
NETP17_6: P17.6 U3.76 | length 338.6
  TOP w7: P17.6@8275,5550 8275,5480 8436.22,5318.78 U3.76@8436.22,5278.15
NETR18_1: R18.1 U1.8 | length 119.6
  TOP w7: U1.8@10154.92,4658 10217,4658 v1(10222.5,4652.5)
  BOTTOM w7: R18.1@10180,4670 10205,4670 v1(10222.5,4652.5)
NETR20_1: R20.1 U1.10 | length 265.7
  TOP w7: U1.10@10154.92,4721 10234,4721 v1(10265,4690)
  BOTTOM w7: 10180,4725 10230,4725 v1(10265,4690) 10285,4670 R20.1@10300,4670
NETR21_2: R21.2 U3.37 | length 114.4
  TOP w7: R21.2@8150,4570 8150,4595 8180.31,4625.31 U3.37@8180.31,4671.85
NETR24_2: R24.2 U3.94 | length 110.2
  TOP w7: U3.94@8081.89,5278.15 8081.89,5326.89 8090,5335 v1(8100,5335)
  BOTTOM w7: R24.2@8100,5295 v1(8100,5335)
NETR26_1: R26.1 U3.70 | length 901.1
  TOP w9: U3.70@8503.15,5112.8 8547.17,5112.8 8549.01,5114.64 8564.64,5114.64 8583.01,5133.01 8583.01,5343.01 8710,5470 8850,5470 9022,5642 9038,5642 R26.1@9055,5625
NETR28_1: R28.1 U3.71 | length 901.1
  TOP w9: U3.71@8503.15,5132.48 8547.17,5132.48 8549.01,5130.64 8558.01,5130.64 8567.01,5139.64 8567.01,5349.64 8703.37,5486 8843.37,5486 9015.37,5658 9038,5658 R28.1@9055,5675
NETR29_1: R29.1 U3.69 | length 1350.8
  TOP w7: U3.69@8503.15,5093.11 8843.11,5093.11 v1(8875,5125) ; v1(9025,5725) R29.1@9055,5725
  BOTTOM w7: v1(8875,5125) 9080,5125 9175,5220 9175,5295 9095,5375 9045,5375 9025,5395 v1(9025,5725)
NETR32_2: R32.2 U3.38 | length 101.9
  TOP w7: R32.2@8200,4570 U3.38@8200,4671.85
NETR33_2: R33.2 U3.1 | length 820.8
  TOP w7: U3.1@7896.85,5211.22 7953.78,5211.22 8175,4990 8175,4800 v1(8250,4725) ; R33.2@8250,4570 v1(8250,4600)
  BOTTOM w7: v1(8250,4600) v1(8250,4725)
NETR34_2: R34.2 U3.2 | length 777.3
  TOP w7: U3.2@7896.85,5191.53 7948.47,5191.53 8150,4990 8150,4769.5 8125,4744.5 v1(8125,4725) ; R34.2@8100,4570 8100,4590 v1(8125,4615)
  BOTTOM w7: v1(8125,4615) v1(8125,4725)
OSC_IN: C29.2 U3.12 X1.3 | length 268.9
  TOP w7: X1.3@7666.27,5043.65 7666.27,5039.65 7703.93,5002 7780,5002 7799,5021 C29.2@7800,5021 7801,5021 7827.31,4994.69 U3.12@7896.85,4994.69
OSC_OUT: C28.1 U3.13 X1.1 | length 185.5
  TOP w7: X1.1@7733.73,4956.35 7733.73,4958.73 7760,4985 7784,4985 C28.1@7800,4969 7819.5,4969 7825.5,4975 U3.13@7896.85,4975
OTG_DM1: P1.33 P12.3 | length 1472.6
  TOP w9: P12.3@5675,5800 5699,5800 5719,5780 5719,5761 5751,5729 6036,5729 6145,5620 6540,5620 6796,5364 6796,5242.86 6794,5240.86 P1.33@6794,5205
OTG_DP1: P1.31 P12.2 | length 1474.4
  TOP w9: P12.2@5775,5800 5745,5800 5735,5790 5735,5767.63 5757.63,5745 6042.63,5745 6151.63,5636 6546.63,5636 6812,5370.63 6812,5242.86 6814,5240.86 P1.31@6814,5205
PA2_TIM5_CH3_EXPOSURE: P16.3 P18.3 U1.23 U3.25 | length 2754.3
  TOP w7: U3.25@7896.85,4738.78 7896.85,4615 7936.85,4575 8020,4575 8040,4555 8040,4470 8160,4350 8640,4350 8740,4450 8855,4450 9045.63,4259.37 P16.3@9185,4259.37 ; U1.23@9972.24,5029.92 9972.24,5092.24 9985,5105 v1(10075,5105)
  BOTTOM w7: v1(10075,5105) 10125,5055 10125,4730 10085.63,4690.63 P18.3@10085.63,4250
PA3_TIM5_CH4_STANDBY: P16.4 P18.4 U1.33 U3.26 | length 3002.4
  TOP w7: U3.26@7963.78,4671.85 7963.78,4633.35 8002.13,4595 8045,4595 8055,4585 8055,4480 8165,4370 8630,4370 8730,4470 8860,4470 9050.94,4279.06 P16.4@9185,4279.06 ; U1.33@9695,4910.24 9770.24,4910.24 v1(9800,4940)
  BOTTOM w7: v1(9800,4940) 9845,4985 9845,5120 9885,5160 9990,5160 10105.31,5044.69 10105.31,4738.16 10065.94,4698.79 P18.4@10065.94,4250
PA4_DCMI_HSYNC: P15.5 P16.16 P18.16 U1.20 U3.29 | length 4083.2
  TOP w7: v1(7575,5400) 7605,5370 7605,5220 v1(7650,5175) ; P15.5@7921.26,5725 7921.26,5668.74 v1(7925,5665) ; v1(7975,4975) 7975,4772.84 8022.84,4725 U3.29@8022.84,4671.85 ; v1(8775,5000) 8795.5,4979.5 8850,4979.5 8869.5,4960 8940,4960 9070,4830 9070,4575 9129.72,4515.28 P16.16@9185,4515.28 ; v1(9975,4900) 9988.79,4913.79 9998.6,4913.79 10066.73,4981.92 U1.20@10066.73,5029.92
  BOTTOM w7: v1(7575,5400) 7600,5400 7720,5520 7720,5616.21 7743.79,5640 7900,5640 v1(7925,5665) ; v1(7650,5175) 7700,5125 7735,5125 7770,5090 7770,5075 7870,4975 v1(7975,4975) 8065,4975 8113.5,5023.5 8751.5,5023.5 v1(8775,5000) ; P18.16@9829.72,4250 9829.72,4495.28 9800,4525 9800,4744.5 9955.5,4900 v1(9975,4900)
PA5_CAM_NRESET: C23.1 P15.7 P16.5 P18.5 R14.1 U1.32 U3.30 | length 4584.9
  TOP w7: v1(7575,5450) 7625,5400 7625,5250 v1(7650,5225) ; P15.7@7881.89,5725 7881.89,5673.11 v1(7890,5665) ; v1(7950,5090) 7950,5065.5 8000,5015.5 8000,4772.52 8042.52,4730 U3.30@8042.52,4671.85 8042.52,4635 8074.99,4602.52 8074.99,4485.01 8172.32,4387.68 8617.68,4387.68 8722.68,4492.68 8867.32,4492.68 9061.26,4298.74 P16.5@9185,4298.74 ; U1.32@9695,4941.73 9758.27,4941.73 v1(9760,4940)
  BOTTOM w7: v1(7575,5450) 7625,5500 7625,5595 7695,5665 v1(7890,5665) ; v1(7650,5225) 7690,5185 7855,5185 v1(7950,5090) ; R14.1@9720,4975 9720,4945.5 9719,4944.5 C23.1@9719,4925 9745,4925 v1(9760,4940) 9785,4915 9820,4915 9865,4960 9865,5105 9900,5140 9975,5140 10085.63,5029.37 10085.63,4746.31 10046.26,4706.94 P18.5@10046.26,4250
PA6_DCMI_PCLK: P15.16 P16.18 P18.18 U1.46 U3.31 | length 3285
  TOP w7: P15.16@7704.72,5725 7704.72,5661.5 7635,5591.78 7635,5505 7675,5465 7675,5250 7775,5150 v1(7775,5125) ; v1(8025,5000) 8025,4975 8050,4950 8050,4747.21 8062.2,4735 U3.31@8062.2,4671.85 ; v1(8900,5000) 8919.5,5000 8924.5,4995 8965,4995 9110,4850 9110,4575 9130.35,4554.65 P16.18@9185,4554.65 ; v1(9775,4475) 9825,4475 9846,4496 U1.46@9846,4570
  BOTTOM w7: v1(7775,5125) 7794.5,5125 7869.5,5050 7975,5050 v1(8025,5000) 8050,5000 8100,5050 8760,5050 8835,4975 8875,4975 v1(8900,5000) ; v1(9775,4475) 9775,4340 9790.35,4324.65 P18.18@9790.35,4250
PB6_DCMI_D5: P15.13 P16.13 P18.13 U1.17 U3.92 | length 3469.2
  TOP w7: v1(7760,5600) 7760,5619.5 7763.78,5623.28 P15.13@7763.78,5725 ; v1(7950,5600) 8000,5600 8030,5570 8030,5515 8045,5500 8085,5500 8121.26,5463.74 U3.92@8121.26,5278.15 8121.26,5239.65 8135,5225.91 8135,5145 8240,5040 8240,4890 v1(8200,4850) ; v1(8825,4925) 8836.33,4913.67 8926.33,4913.67 9025,4815 9025,4550 9118.78,4456.22 P16.13@9185,4456.22 ; v1(10025,4850) 10075,4900 10075,4910 10106.73,4941.73 U1.17@10154.92,4941.73
  BOTTOM w7: v1(7760,5600) v1(7950,5600) ; v1(8200,4850) 8220,4850 8245,4875 8775,4875 v1(8825,4925) ; P18.13@9888.78,4250 9888.78,4743.78 9970,4825 10000,4825 v1(10025,4850)